# EAGLE board 08C-005-A1-01 (EAGLE 9.6.2)
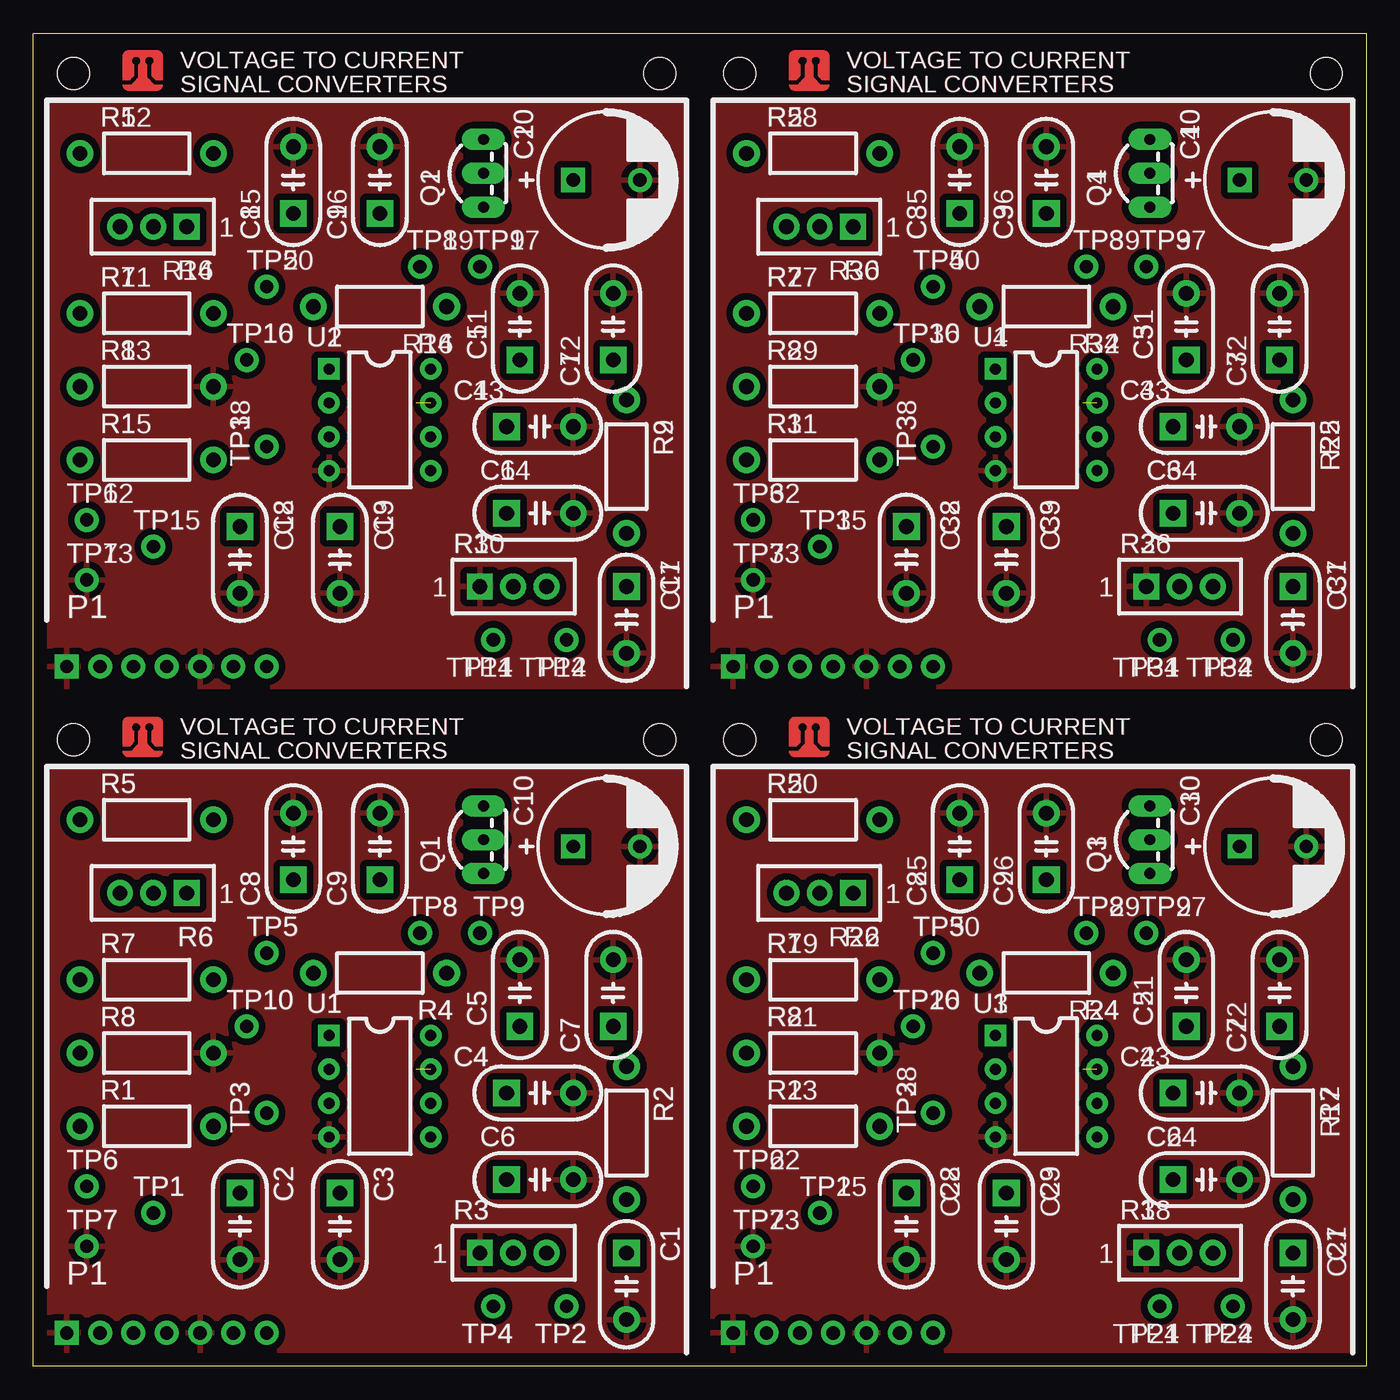
[diagram p0: board, top side]
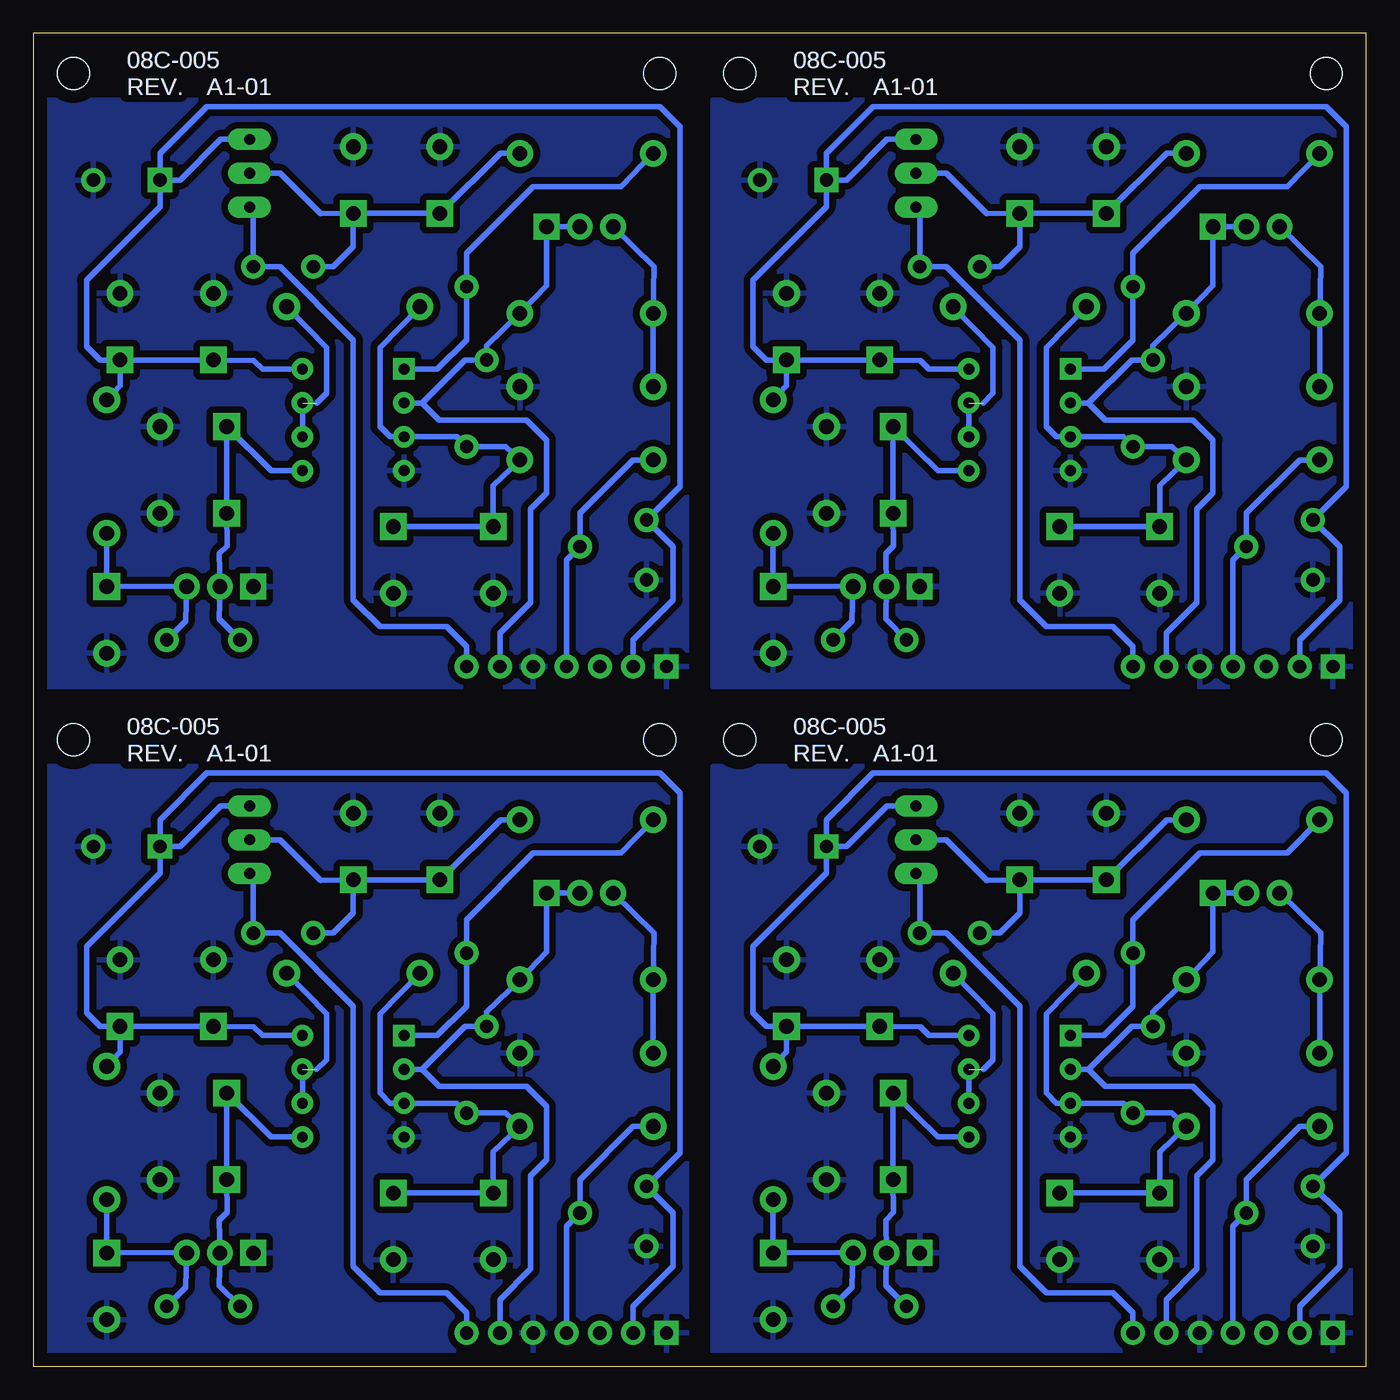
[diagram p1: board, bottom side, seen from below]

Size 100 x 100 mm. Coordinates in mm from the lower left corner, seen from the top.
Outline: 0,0 0,100 100,100 100,0 0,0
Copper layers (1*16): Top 0.035mm / dielectric 1.5mm / Bottom 0.035mm
Design rules "minipcb-THD": minimum track width 0.5mm, minimum drill 0.5mm, track to track 0.5mm, track to pad 0.5mm, pad to pad 0.5mm, via to via 0.5mm, smd to smd 0mil, copper to edge 1mm, drill to drill 1mm, minimum pad ring 0.4mm, minimum via ring 0.4mm, stop-mask expansion 0.1mm, vias tented up to drill 0.6mm, thermal gap 0.5mm

## Footprints (pad centres in the part's own frame; a part is rotated, then mirrored left to right if it is on the bottom)
C050-024X044 = drill 1.1 pad 2 square: 1 -2.5,0 | drill 1.1 pad 2: 2 2.5,0
C5MM = drill 1 square: + -2.5,0 | drill 1: - 2.5,0
PINS_1X7 = drill 1 square: 1 0,0 | drill 1: 2 2.5,0; 3 5,0; 4 7.5,0; 5 10,0; 6 12.5,0; 7 15,0
MINIPCB_0P_50X50MM = hole 2.4: 47,47; 3,47
TO92-EBC-OVAL = drill 0.813 long: B 0,-1.27; C 2.54,-1.27; E -2.54,-1.27
0207/10 = drill 1.1 pad 2: 1 -5,0; 2 5,0
TRIM_0100 = drill 1.1 pad 1.93 square: 1 0,0 | drill 1.1 pad 1.93: 2 2.5,0; 3 5,0
PINS_1_TESTPOINT_KE5000_NOTEXT = drill 1: 1 0,0
DIL08 = drill 0.813 square: 1 -3.81,-3.81 | drill 0.813: 2 -1.27,-3.81; 3 1.27,-3.81; 4 3.81,-3.81; 5 3.81,3.81; 6 1.27,3.81; 7 -1.27,3.81; 8 -3.81,3.81

## Placement (x,y rotation side)
C1  [C050-024X044]  44.5,6 270 top
C2  [C050-024X044]  15.5,10.5 270 top
C3  [C050-024X044]  23,10.5 270 top
C4  [C050-024X044]  38,20.5 0 top
C5  [C050-024X044]  36.5,28 90 top
C6  [C050-024X044]  38,14 0 top
C7  [C050-024X044]  43.5,28 90 top
C8  [C050-024X044]  19.5,39 90 top
C9  [C050-024X044]  26,39 90 top
C10  [C5MM]  43,39 0 top
C11  [C050-024X044]  36.5,78 90 top
C12  [C050-024X044]  43.5,78 90 top
C13  [C050-024X044]  38,70.5 0 top
C14  [C050-024X044]  38,64 0 top
C15  [C050-024X044]  19.5,89 90 top
C16  [C050-024X044]  26,89 90 top
C17  [C050-024X044]  44.5,56 270 top
C18  [C050-024X044]  15.5,60.5 270 top
C19  [C050-024X044]  23,60.5 270 top
C20  [C5MM]  43,89 0 top
C21  [C050-024X044]  86.5,28 90 top
C22  [C050-024X044]  93.5,28 90 top
C23  [C050-024X044]  88,20.5 0 top
C24  [C050-024X044]  88,14 0 top
C25  [C050-024X044]  69.5,39 90 top
C26  [C050-024X044]  76,39 90 top
C27  [C050-024X044]  94.5,6 270 top
C28  [C050-024X044]  65.5,10.5 270 top
C29  [C050-024X044]  73,10.5 270 top
C30  [C5MM]  93,39 0 top
C31  [C050-024X044]  86.5,78 90 top
C32  [C050-024X044]  93.5,78 90 top
C33  [C050-024X044]  88,70.5 0 top
C34  [C050-024X044]  88,64 0 top
C35  [C050-024X044]  69.5,89 90 top
C36  [C050-024X044]  76,89 90 top
C37  [C050-024X044]  94.5,56 270 top
C38  [C050-024X044]  65.5,60.5 270 top
C39  [C050-024X044]  73,60.5 270 top
C40  [C5MM]  93,89 0 top
E$1  [MINIPCB_PANEL_IMAGEFRAME]  -25,-30 0 top  (outside the outline)
P1  [PINS_1X7]  2.5,2.5 0 top
P2  [PINS_1X7]  2.5,52.5 0 top
P3  [PINS_1X7]  52.5,2.5 0 top
P4  [PINS_1X7]  52.5,52.5 0 top
PCB1  [MINIPCB_0P_50X50MM]  0,0 0 top
PCB2  [MINIPCB_0P_50X50MM]  0,50 0 top
PCB3  [MINIPCB_0P_50X50MM]  50,0 0 top
PCB4  [MINIPCB_0P_50X50MM]  50,50 0 top
Q1  [TO92-EBC-OVAL]  32.5,39.5 90 top
Q2  [TO92-EBC-OVAL]  32.5,89.5 90 top
Q3  [TO92-EBC-OVAL]  82.5,39.5 90 top
Q4  [TO92-EBC-OVAL]  82.5,89.5 90 top
R1  [0207/10]  8.5,18 0 top
R2  [0207/10]  44.5,17.5 270 top
R3  [TRIM_0100]  33.5,8.5 0 top
R4  [0207/10]  26,29.5 180 top
R5  [0207/10]  8.5,41 0 top
R6  [TRIM_0100]  11.5,35.5 180 top
R7  [0207/10]  8.5,29 0 top
R8  [0207/10]  8.5,23.5 0 top
R9  [0207/10]  44.5,67.5 270 top
R10  [TRIM_0100]  33.5,58.5 0 top
R11  [0207/10]  8.5,79 0 top
R12  [0207/10]  8.5,91 0 top
R13  [0207/10]  8.5,73.5 0 top
R14  [TRIM_0100]  11.5,85.5 180 top
R15  [0207/10]  8.5,68 0 top
R16  [0207/10]  26,79.5 180 top
R17  [0207/10]  94.5,17.5 270 top
R18  [TRIM_0100]  83.5,8.5 0 top
R19  [0207/10]  58.5,29 0 top
R20  [0207/10]  58.5,41 0 top
R21  [0207/10]  58.5,23.5 0 top
R22  [TRIM_0100]  61.5,35.5 180 top
R23  [0207/10]  58.5,18 0 top
R24  [0207/10]  76,29.5 180 top
R25  [0207/10]  94.5,67.5 270 top
R26  [TRIM_0100]  83.5,58.5 0 top
R27  [0207/10]  58.5,79 0 top
R28  [0207/10]  58.5,91 0 top
R29  [0207/10]  58.5,73.5 0 top
R30  [TRIM_0100]  61.5,85.5 180 top
R31  [0207/10]  58.5,68 0 top
R32  [0207/10]  76,79.5 180 top
TP1  [PINS_1_TESTPOINT_KE5000_NOTEXT]  9,11.5 0 top
TP2  [PINS_1_TESTPOINT_KE5000_NOTEXT]  40,4.5 180 top
TP3  [PINS_1_TESTPOINT_KE5000_NOTEXT]  17.5,19 90 top
TP4  [PINS_1_TESTPOINT_KE5000_NOTEXT]  34.5,4.5 180 top
TP5  [PINS_1_TESTPOINT_KE5000_NOTEXT]  17.5,31 0 top
TP6  [PINS_1_TESTPOINT_KE5000_NOTEXT]  4,13.5 0 top
TP7  [PINS_1_TESTPOINT_KE5000_NOTEXT]  4,9 0 top
TP8  [PINS_1_TESTPOINT_KE5000_NOTEXT]  29,32.5 0 top
TP9  [PINS_1_TESTPOINT_KE5000_NOTEXT]  33.5,32.5 0 top
TP10  [PINS_1_TESTPOINT_KE5000_NOTEXT]  16,25.5 0 top
TP11  [PINS_1_TESTPOINT_KE5000_NOTEXT]  34.5,54.5 180 top
TP12  [PINS_1_TESTPOINT_KE5000_NOTEXT]  4,63.5 0 top
TP13  [PINS_1_TESTPOINT_KE5000_NOTEXT]  4,59 0 top
TP14  [PINS_1_TESTPOINT_KE5000_NOTEXT]  40,54.5 180 top
TP15  [PINS_1_TESTPOINT_KE5000_NOTEXT]  9,61.5 0 top
TP16  [PINS_1_TESTPOINT_KE5000_NOTEXT]  16,75.5 0 top
TP17  [PINS_1_TESTPOINT_KE5000_NOTEXT]  33.5,82.5 0 top
TP18  [PINS_1_TESTPOINT_KE5000_NOTEXT]  17.5,69 90 top
TP19  [PINS_1_TESTPOINT_KE5000_NOTEXT]  29,82.5 0 top
TP20  [PINS_1_TESTPOINT_KE5000_NOTEXT]  17.5,81 0 top
TP21  [PINS_1_TESTPOINT_KE5000_NOTEXT]  84.5,4.5 180 top
TP22  [PINS_1_TESTPOINT_KE5000_NOTEXT]  54,13.5 0 top
TP23  [PINS_1_TESTPOINT_KE5000_NOTEXT]  54,9 0 top
TP24  [PINS_1_TESTPOINT_KE5000_NOTEXT]  90,4.5 180 top
TP25  [PINS_1_TESTPOINT_KE5000_NOTEXT]  59,11.5 0 top
TP26  [PINS_1_TESTPOINT_KE5000_NOTEXT]  66,25.5 0 top
TP27  [PINS_1_TESTPOINT_KE5000_NOTEXT]  83.5,32.5 0 top
TP28  [PINS_1_TESTPOINT_KE5000_NOTEXT]  67.5,19 90 top
TP29  [PINS_1_TESTPOINT_KE5000_NOTEXT]  79,32.5 0 top
TP30  [PINS_1_TESTPOINT_KE5000_NOTEXT]  67.5,31 0 top
TP31  [PINS_1_TESTPOINT_KE5000_NOTEXT]  84.5,54.5 180 top
TP32  [PINS_1_TESTPOINT_KE5000_NOTEXT]  54,63.5 0 top
TP33  [PINS_1_TESTPOINT_KE5000_NOTEXT]  54,59 0 top
TP34  [PINS_1_TESTPOINT_KE5000_NOTEXT]  90,54.5 180 top
TP35  [PINS_1_TESTPOINT_KE5000_NOTEXT]  59,61.5 0 top
TP36  [PINS_1_TESTPOINT_KE5000_NOTEXT]  66,75.5 0 top
TP37  [PINS_1_TESTPOINT_KE5000_NOTEXT]  83.5,82.5 0 top
TP38  [PINS_1_TESTPOINT_KE5000_NOTEXT]  67.5,69 90 top
TP39  [PINS_1_TESTPOINT_KE5000_NOTEXT]  79,82.5 0 top
TP40  [PINS_1_TESTPOINT_KE5000_NOTEXT]  67.5,81 0 top
U1  [DIL08]  26,21 270 top
U2  [DIL08]  26,71 270 top
U3  [DIL08]  76,21 270 top
U4  [DIL08]  76,71 270 top

## Library data of the parts
C1-C40 E$1 P1-P4 Q1-Q4 R1-R32 TP1-TP40 U1-U4 = minipcb
PCB1-PCB4 = minipcb; CIRCUIT_CATEGORY: SIGNAL CONVERTERS; PART_NUMBER: 08C-005; REVISION: A1-01; TITLE: VOLTAGE TO CURRENT

## Nets
BIAS: C4.1 C6.1 R3.2 TP4.1 U1.5
BIAS1: C13.1 C14.1 R10.2 TP11.1 U2.5
BIAS2: C23.1 C24.1 R18.2 TP21.1 U3.5
BIAS3: C33.1 C34.1 R26.2 TP31.1 U4.5
GND: C1.2 C2.2 C3.2 C4.2 C5.2 C6.2 C7.2 C8.2 C9.2 C10.- P1.1 P1.5 R3.1 R8.2 TP7.1 U1.4
GND1: C11.2 C12.2 C13.2 C14.2 C15.2 C16.2 C17.2 C18.2 C19.2 C20.- P2.1 P2.5 R10.1 R13.2 TP13.1 U2.4
GND2: C21.2 C22.2 C23.2 C24.2 C25.2 C26.2 C27.2 C28.2 C29.2 C30.- P3.1 P3.5 R18.1 R21.2 TP23.1 U3.4
GND3: C31.2 C32.2 C33.2 C34.2 C35.2 C36.2 C37.2 C38.2 C39.2 C40.- P4.1 P4.5 R26.1 R29.2 TP33.1 U4.4
IN: R4.1 U1.6 U1.7
IN1: R16.1 U2.6 U2.7
IN2: R24.1 U3.6 U3.7
IN3: R32.1 U4.6 U4.7
N$1: C2.1 C3.1 R1.2 R4.2 TP3.1 U1.3
N$2: P1.4 R1.1 TP1.1
N$3: P2.4 R15.1 TP15.1
N$4: C18.1 C19.1 R15.2 R16.2 TP18.1 U2.3
N$5: P3.4 R23.1 TP25.1
N$6: C28.1 C29.1 R23.2 R24.2 TP28.1 U3.3
N$7: P4.4 R31.1 TP35.1
N$8: C38.1 C39.1 R31.2 R32.2 TP38.1 U4.3
OUT+: P1.7 Q1.E TP9.1
OUT+1: P2.7 Q2.E TP17.1
OUT+2: P3.7 Q3.E TP27.1
OUT+3: P4.7 Q4.E TP37.1
OUT-: P1.6 R6.1 R6.2 R7.2 TP10.1 U1.2
OUT-1: P2.6 R11.2 R14.1 R14.2 TP16.1 U2.2
OUT-2: P3.6 R19.2 R22.1 R22.2 TP26.1 U3.2
OUT-3: P4.6 R27.2 R30.1 R30.2 TP36.1 U4.2
Q1.B: C8.1 C9.1 Q1.B R5.2 TP8.1
Q1.B1: C15.1 C16.1 Q2.B R12.2 TP19.1
Q1.B2: C25.1 C26.1 Q3.B R20.2 TP29.1
Q1.B3: C35.1 C36.1 Q4.B R28.2 TP39.1
R2.1: C17.1 R9.2 R10.3 TP14.1
R2.2: C27.1 R17.2 R18.3 TP24.1
R2.3: C1.1 R2.2 R3.3 TP2.1
R2.4: C37.1 R25.2 R26.3 TP34.1
R6.1: R11.1 R13.1 R14.3
R6.2: R19.1 R21.1 R22.3
R6.3: R6.3 R7.1 R8.1
R6.4: R27.1 R29.1 R30.3
U1.1: R5.1 TP5.1 U1.1
U1.2: R12.1 TP20.1 U2.1
U1.3: R20.1 TP30.1 U3.1
U1.4: R28.1 TP40.1 U4.1
V+: C5.1 C7.1 C10.+ P1.2 Q1.C R2.1 TP6.1 U1.8
V+1: C11.1 C12.1 C20.+ P2.2 Q2.C R9.1 TP12.1 U2.8
V+2: C21.1 C22.1 C30.+ P3.2 Q3.C R17.1 TP22.1 U3.8
V+3: C31.1 C32.1 C40.+ P4.2 Q4.C R25.1 TP32.1 U4.8

## Tracks (layer width: path | path; a pad name or v marks a point on that pad's centre or on a via)
BIAS
  Bottom 0.406: TP4.1 36.04,6.04 R3.2 36.04,10.96 35.46,11.54 C6.1 C4.1 32.15,17.19 U1.5
BIAS1
  Bottom 0.406: TP11.1 36.04,56.04 R10.2 36.04,60.96 35.46,61.54 C14.1 C13.1 32.15,67.19 U2.5
BIAS2
  Bottom 0.406: TP21.1 86.04,6.04 R18.2 86.04,10.96 85.46,11.54 C24.1 C23.1 82.15,17.19 U3.5
BIAS3
  Bottom 0.406: TP31.1 86.04,56.04 R26.2 86.04,60.96 85.46,61.54 C34.1 C33.1 82.15,67.19 U4.5
GND
  pour Bottom: 1,1 49,1 49,45 2,45 1,45
  pour Top: 1,1 49,1 49,45 2,45 1,45
GND1
  pour Bottom: 1,51 49,51 49,95 2,95 1,95
  pour Top: 1,51 49,51 49,95 2,95 1,95
GND2
  pour Bottom: 51,1 99,1 99,45 52,45 51,45
  pour Top: 51,1 99,1 99,45 52,45 51,45
GND3
  pour Bottom: 51,51 99,51 99,95 52,95 51,95
  pour Top: 51,51 99,51 99,95 52,95 51,95
IN  (1 unrouted)
  Bottom 0.406: 28.73,22.27 28,23 28,26.42 R4.1 | U1.7 U1.6
IN1  (1 unrouted)
  Bottom 0.406: 28.73,72.27 28,73 28,76.42 R16.1 | U2.7 U2.6
IN2  (1 unrouted)
  Bottom 0.406: 78.73,22.27 78,23 78,26.42 R24.1 | U3.7 U3.6
IN3  (1 unrouted)
  Bottom 0.406: 78.73,72.27 78,73 78,76.42 R32.1 | U4.7 U4.6
N$1
  Bottom 0.406: R4.2 24,26.42 24,20.5 23.23,19.73 U1.3 18.23,19.73 TP3.1 14.58,19 R1.2 15.5,16.08 C2.1 C3.1
N$2
  Bottom 0.406: R1.1 5,18 9,14 TP1.1 10,10.5 P1.4
N$3
  Bottom 0.406: R15.1 5,68 9,64 TP15.1 10,60.5 P2.4
N$4
  Bottom 0.406: R16.2 24,76.42 24,70.5 23.23,69.73 U2.3 18.23,69.73 TP18.1 14.58,69 R15.2 15.5,66.08 C18.1 C19.1
N$5
  Bottom 0.406: R23.1 55,18 59,14 TP25.1 60,10.5 P3.4
N$6
  Bottom 0.406: R24.2 74,26.42 74,20.5 73.23,19.73 U3.3 68.23,19.73 TP28.1 64.58,19 R23.2 65.5,16.08 C28.1 C29.1
N$7
  Bottom 0.406: R31.1 55,68 59,64 TP35.1 60,60.5 P4.4
N$8
  Bottom 0.406: R32.2 74,76.42 74,70.5 73.23,69.73 U4.3 68.23,69.73 TP38.1 64.58,69 R31.2 65.5,66.08 C38.1 C39.1
OUT+
  Bottom 0.406: Q1.E 33.77,36.77 33.5,36.5 TP9.1 31.5,32.5 26,27 26,7.5 24,5.5 19,5.5 17.5,4 P1.7
OUT+1
  Bottom 0.406: Q2.E 33.77,86.77 33.5,86.5 TP17.1 31.5,82.5 26,77 26,57.5 24,55.5 19,55.5 17.5,54 P2.7
OUT+2
  Bottom 0.406: Q3.E 83.77,36.77 83.5,36.5 TP27.1 81.5,32.5 76,27 76,7.5 74,5.5 69,5.5 67.5,4 P3.7
OUT+3
  Bottom 0.406: Q4.E 83.77,86.77 83.5,86.5 TP37.1 81.5,82.5 76,77 76,57.5 74,55.5 69,55.5 67.5,54 P4.7
OUT-
  Bottom 0.406: R6.2 R6.1 11.5,31.08 R7.2 16,26.58 TP10.1 17.6,25.5 20.83,22.27 | 20.83,22.27 U1.2 | 20.53,21.97 19.56,21 13,21 11.5,19.5 11.5,15.5 12.7,14.3 12.7,7.3 15,5 P1.6 | 20.53,21.97 20.83,22.27 | 20.53,21.97
OUT-1
  Bottom 0.406: R14.2 R14.1 11.5,81.08 R11.2 16,76.58 TP16.1 17.6,75.5 20.83,72.27 | 20.83,72.27 U2.2 | 20.53,71.97 19.56,71 13,71 11.5,69.5 11.5,65.5 12.7,64.3 12.7,57.3 15,55 P2.6 | 20.53,71.97 20.83,72.27 | 20.53,71.97
OUT-2
  Bottom 0.406: R22.2 R22.1 61.5,31.08 R19.2 66,26.58 TP26.1 67.6,25.5 70.83,22.27 | 70.83,22.27 U3.2 | 70.53,21.97 69.56,21 63,21 61.5,19.5 61.5,15.5 62.7,14.3 62.7,7.3 65,5 P3.6 | 70.53,21.97 70.83,22.27 | 70.53,21.97
OUT-3
  Bottom 0.406: R30.2 R30.1 61.5,81.08 R27.2 66,76.58 TP36.1 67.6,75.5 70.83,72.27 | 70.83,72.27 U4.2 | 70.53,71.97 69.56,71 63,71 61.5,69.5 61.5,65.5 62.7,64.3 62.7,57.3 65,55 P4.6 | 70.53,71.97 70.83,72.27 | 70.53,71.97
Q1.B
  Bottom 0.406: R5.2 14.96,41 C8.1 C9.1 | C9.1 26,34 27.5,32.5 TP8.1 | C9.1 28.46,36.46 31.5,39.5 Q1.B
Q1.B1
  Bottom 0.406: R12.2 14.96,91 C15.1 C16.1 | C16.1 26,84 27.5,82.5 TP19.1 | C16.1 28.46,86.46 31.5,89.5 Q2.B
Q1.B2
  Bottom 0.406: R20.2 64.96,41 C25.1 C26.1 | C26.1 76,34 77.5,32.5 TP29.1 | C26.1 78.46,36.46 81.5,39.5 Q3.B
Q1.B3
  Bottom 0.406: R28.2 64.96,91 C35.1 C36.1 | C36.1 76,84 77.5,82.5 TP39.1 | C36.1 78.46,86.46 81.5,89.5 Q4.B
R2.1
  Bottom 0.406: TP14.1 38.58,55.92 R10.3 38.62,58.54 C17.1 R9.2
R2.2
  Bottom 0.406: TP24.1 88.58,5.92 R18.3 88.62,8.54 C27.1 R17.2
R2.3
  Bottom 0.406: TP2.1 38.58,5.92 R3.3 38.62,8.54 C1.1 R2.2
R2.4
  Bottom 0.406: TP34.1 88.58,55.92 R26.3 88.62,58.54 C37.1 R25.2
R6.1
  Bottom 0.406: R13.1 R11.1 3.42,82.5 R14.3
R6.2
  Bottom 0.406: R21.1 R19.1 53.42,32.5 R22.3
R6.3
  Bottom 0.406: R8.1 R7.1 3.42,32.5 R6.3
R6.4
  Bottom 0.406: R29.1 R27.1 53.42,82.5 R30.3
U1.1
  Bottom 0.406: R5.1 5.92,38.5 12.5,38.5 17.5,33.5 TP5.1 17.5,27 19.69,24.81 U1.1
U1.2
  Bottom 0.406: R12.1 5.92,88.5 12.5,88.5 17.5,83.5 TP20.1 17.5,77 19.69,74.81 U2.1
U1.3
  Bottom 0.406: R20.1 55.92,38.5 62.5,38.5 67.5,33.5 TP30.1 67.5,27 69.69,24.81 U3.1
U1.4
  Bottom 0.406: R28.1 55.92,88.5 62.5,88.5 67.5,83.5 TP40.1 67.5,77 69.69,74.81 U4.1
V+
  Bottom 0.406: C10.+ 40.5,41 37,44.5 3,44.5 1.5,43 1.5,16 TP6.1 2,11.5 2,7.5 5,4.5 P1.2 | Q1.C 35.96,42.04 39,39 C10.+ | U1.8 32.81,24.81 33.46,25.46 C5.1 C7.1 | C7.1 43.5,23.58 R2.1 | C10.+ 40.5,37 46,31.5 46,26.5 45,25.5 43.54,25.5 C7.1
V+1
  Bottom 0.406: C20.+ 40.5,91 37,94.5 3,94.5 1.5,93 1.5,66 TP12.1 2,61.5 2,57.5 5,54.5 P2.2 | Q2.C 35.96,92.04 39,89 C20.+ | U2.8 32.81,74.81 33.46,75.46 C11.1 C12.1 | C12.1 43.5,73.58 R9.1 | C20.+ 40.5,87 46,81.5 46,76.5 45,75.5 43.54,75.5 C12.1
V+2
  Bottom 0.406: C30.+ 90.5,41 87,44.5 53,44.5 51.5,43 51.5,16 TP22.1 52,11.5 52,7.5 55,4.5 P3.2 | Q3.C 85.96,42.04 89,39 C30.+ | U3.8 82.81,24.81 83.46,25.46 C21.1 C22.1 | C22.1 93.5,23.58 R17.1 | C30.+ 90.5,37 96,31.5 96,26.5 95,25.5 93.54,25.5 C22.1
V+3
  Bottom 0.406: C40.+ 90.5,91 87,94.5 53,94.5 51.5,93 51.5,66 TP32.1 52,61.5 52,57.5 55,54.5 P4.2 | Q4.C 85.96,92.04 89,89 C40.+ | U4.8 82.81,74.81 83.46,75.46 C31.1 C32.1 | C32.1 93.5,73.58 R25.1 | C40.+ 90.5,87 96,81.5 96,76.5 95,75.5 93.54,75.5 C32.1

## Text on the board
_tNames: R5 | R5 | C10 | C10 | Q1 | Q1 | C8 | C9 | C8 | C9 | TP8 | TP9 | TP8 | TP9 | R6 | R6 | TP5 | TP5 | R7 | R7 | TP10 | R4 | TP10 | R4 | R8 | U1 | C5 | R8 | U1 | C5 | C7 | C7 | C4 | C4 | R2 | R2 | R1 | R1 | TP3 | TP3 | C6 | C6 | TP6 | C2 | C3 | TP6 | C2 | C3 | TP1 | TP1 | R3 | C1 | R3 | C1 | TP7 | TP7 | TP4 | TP2 | TP4 | TP2 | R5 | R5 | C10 | C10 | Q1 | Q1 | C8 | C9 | C8 | C9 | TP8 | TP9 | TP8 | TP9 | R6 | R6 | TP5 | TP5 | R7 | R7 | TP10 | R4 | TP10 | R4 | R8 | U1 | C5 | R8 | U1 | C5 | C7 | C7 | C4 | C4 | R2 | R2 | R1 | R1 | TP3 | TP3 | C6 | C6 | TP6 | C2 | C3 | TP6 | C2 | C3 | TP1 | TP1 | R3 | C1 | R3 | C1 | TP7 | TP7 | TP4 | TP2 | TP4 | TP2